# Altium PCB Greenhouse.PcbDoc (part 1 of 2)
Units mil, origin at the board's own origin, x right, y up, seen from the top; angles counter-clockwise.
Board outline 3900 x 3775 mil, 2 copper layers (Top Layer, Bottom Layer); 118 components, 76 nets, 461 pads, 55 vias.
Unrouted connection lines stored in the file: 2.
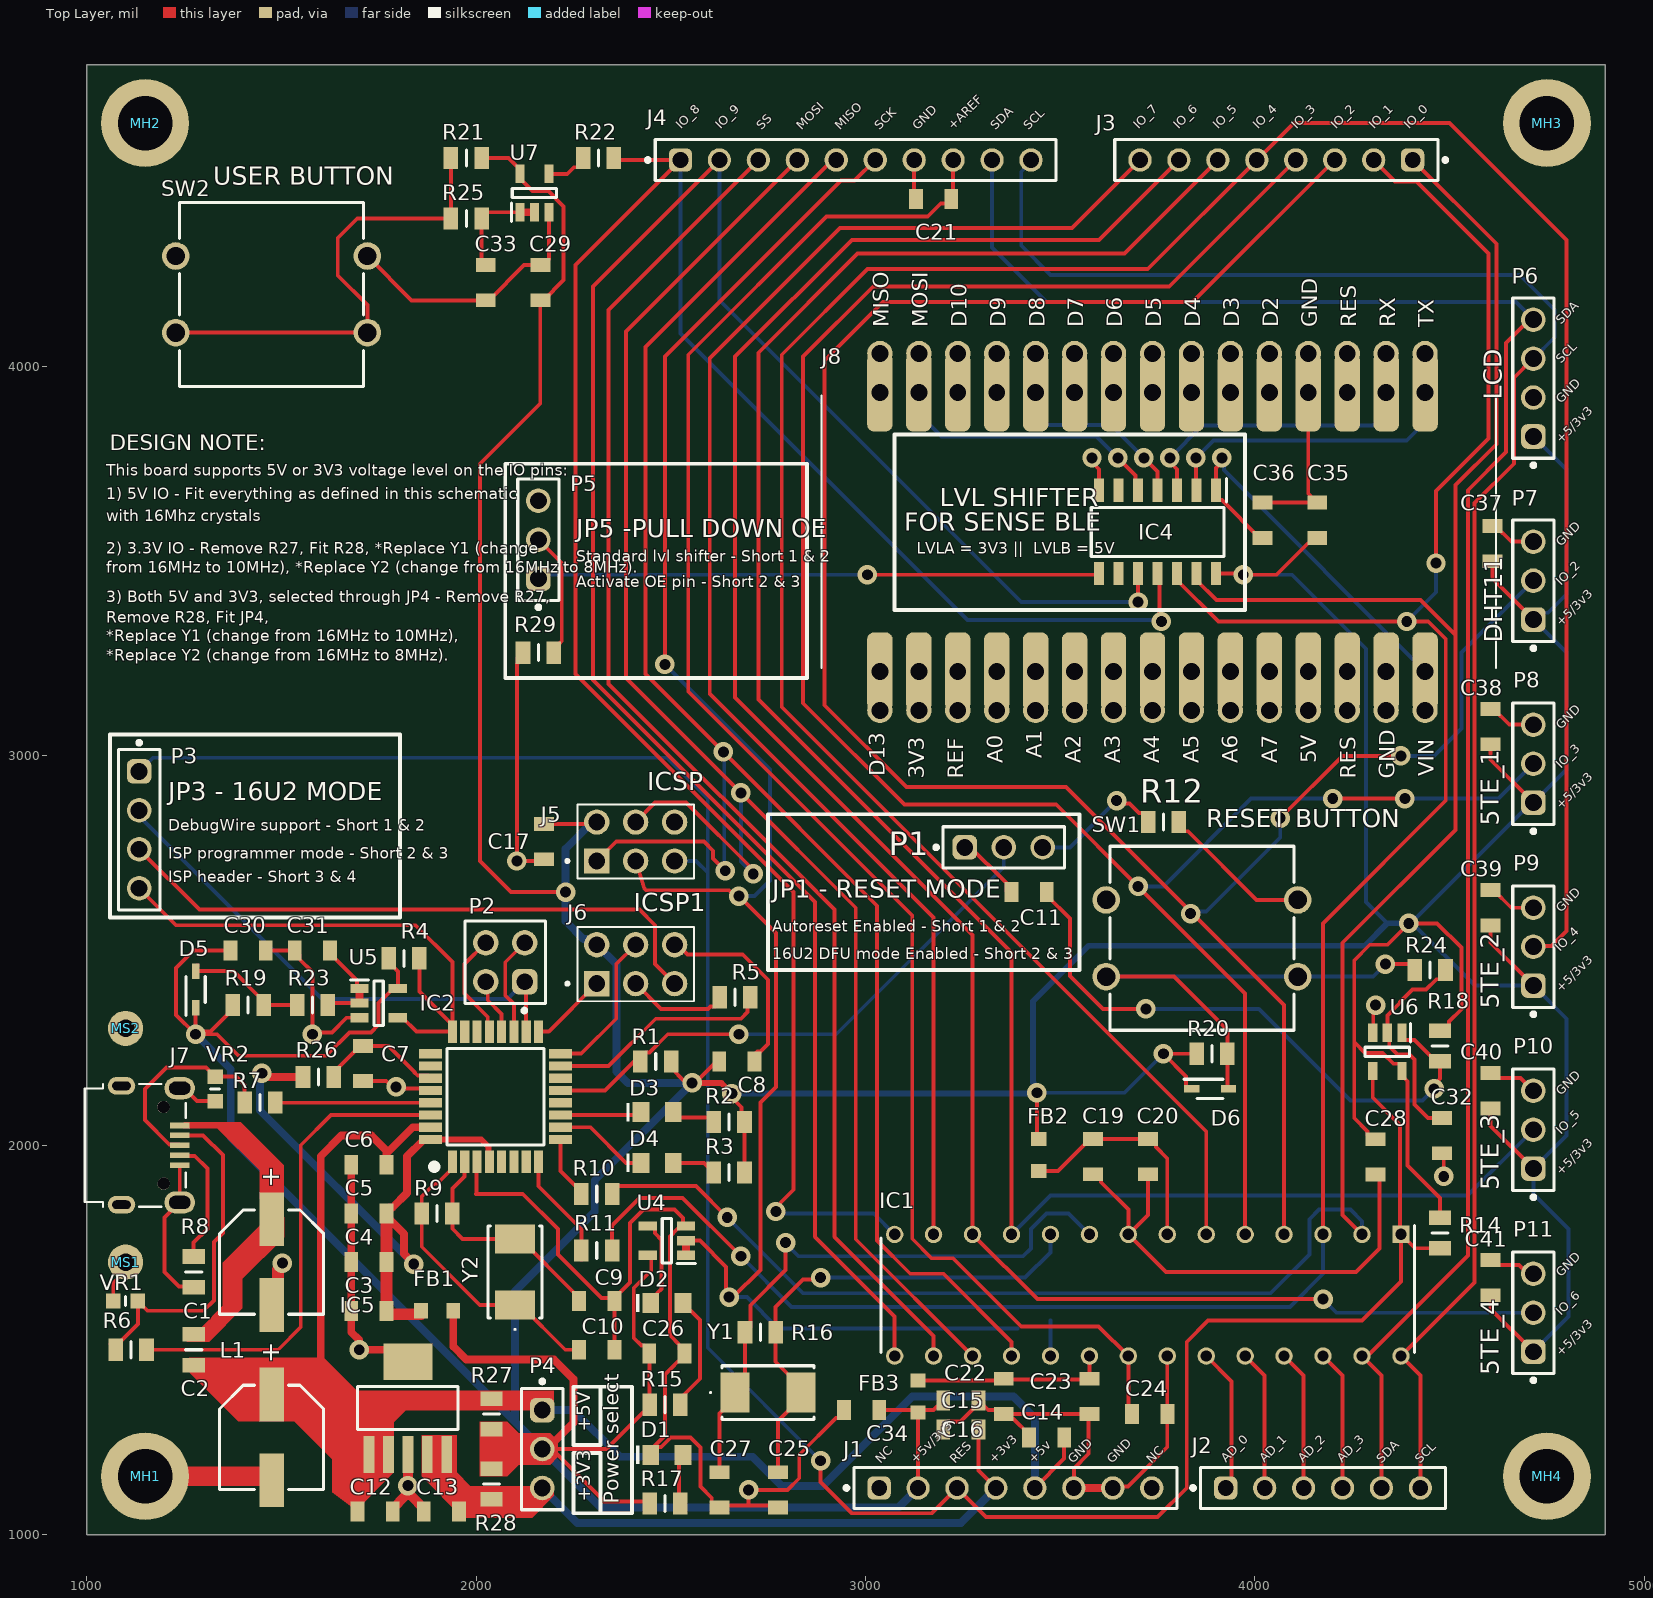
[diagram p0: Top Layer view]
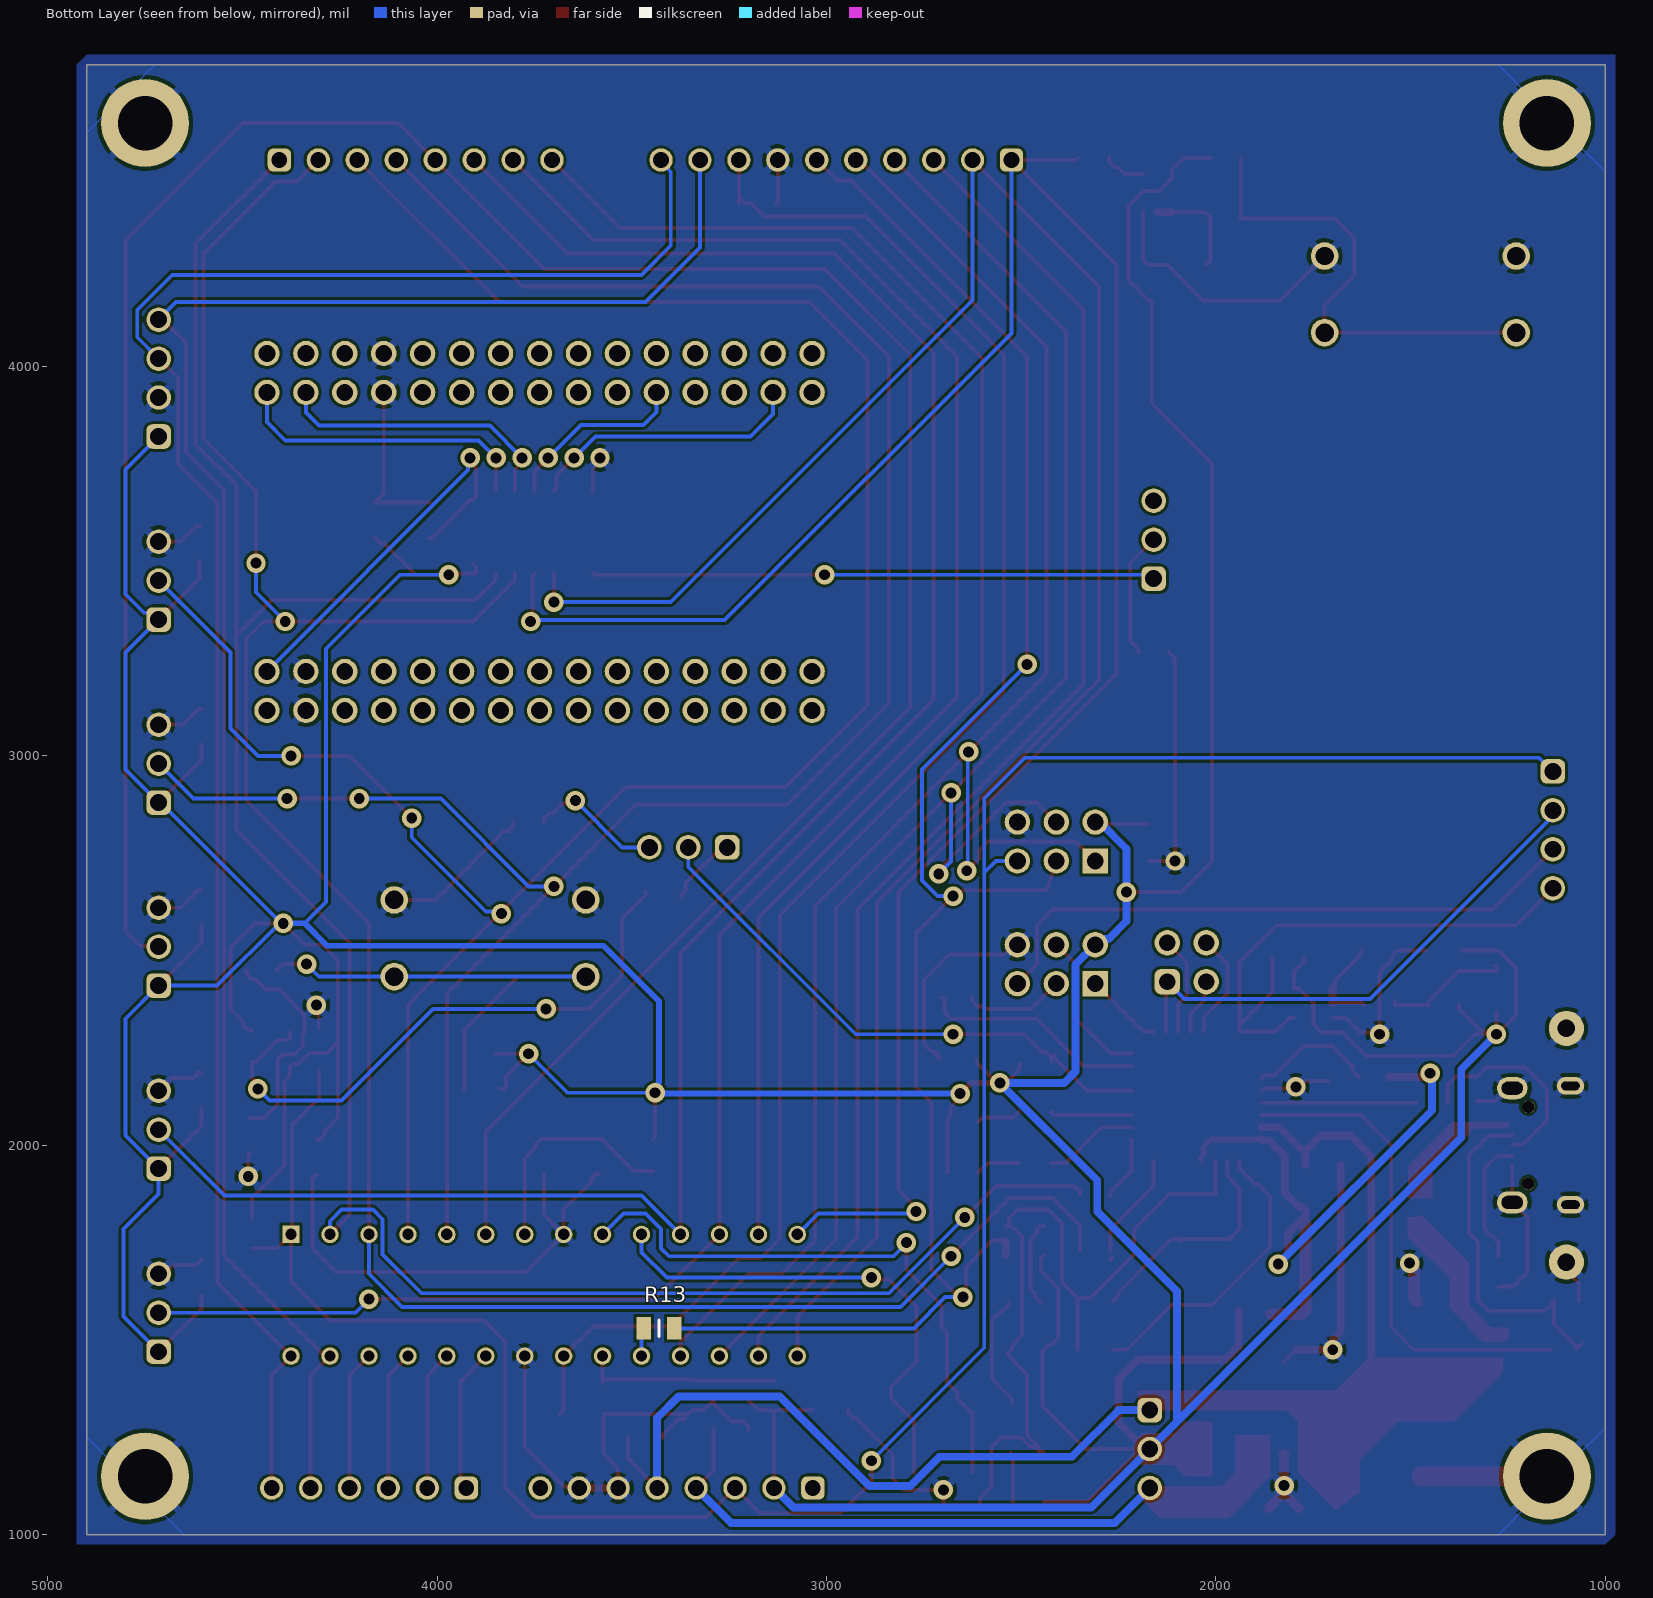
[diagram p1: Bottom Layer view, seen from below]
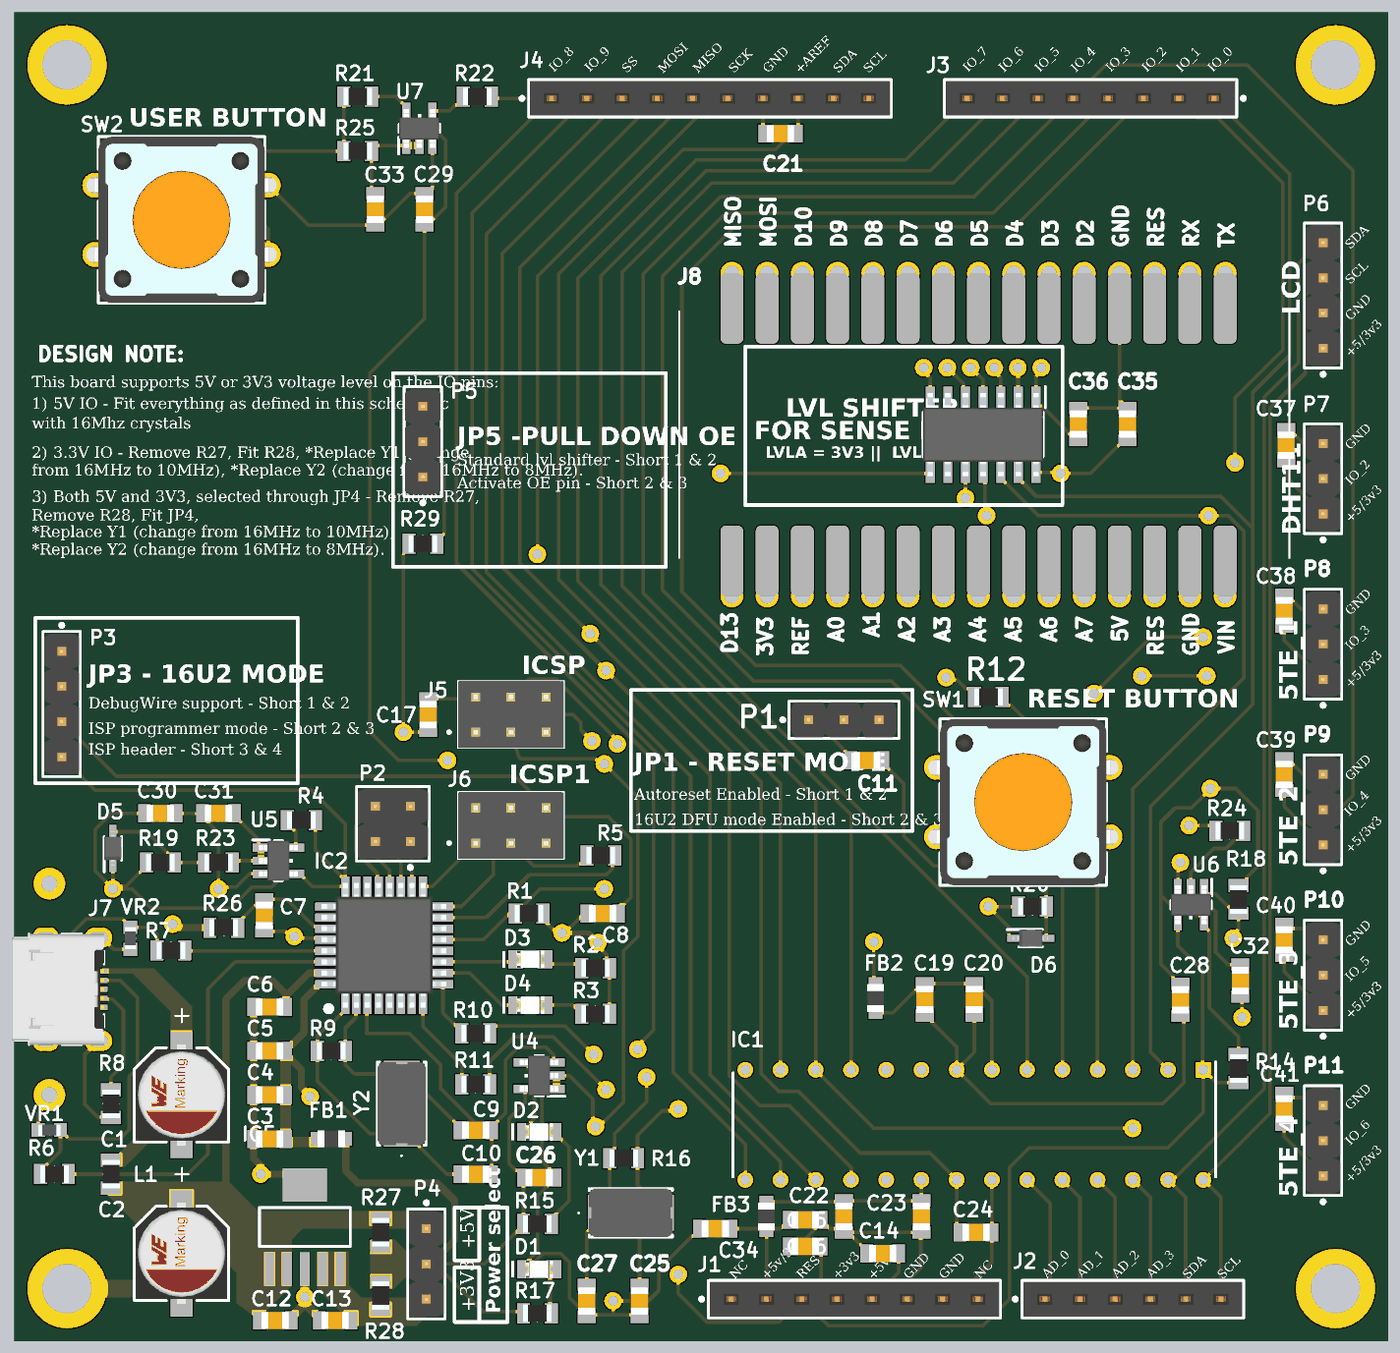
[diagram p3: 3D render of the assembled board from above, using the file's embedded part models]

## Layer stack, top to bottom
Top Solder: solder mask 0.4, Solder Resist, Dk 3.5
Top Layer: signal copper 1.4
Dielectric 1: dielectric 12.6, FR-4, Dk 4.8
Bottom Layer: signal copper 1.4
Bottom Solder: solder mask 0.4, Solder Resist, Dk 3.5

## Board outline
1000,1000 4900,1000 4900,4775 1000,4775

## Design rules (kind name [scope] priority, off if disabled: settings)
Clearance [All] p1: gap=7 ignorepadtopadclearanceinfootprint=FALSE except(5: Text-Text Text-Hole; 10: Arc-Via Track-Via Via-Via)
ComponentClearance [All] p1: gap=10 collisioncheckmode=3 verticalgap=10 showdistances=TRUE donotcheckwithout3dbody=TRUE
HoleSize [All] p1: absolutevalues=TRUE maxlimit=200 minlimit=10 maxpercent=80.000 minpercent=20.000
HoleToHoleClearance [All] p1: gap=11 allowstackedmicrovias=TRUE
PlaneConnect [All] p1: pad.planeconnectstyle=Relief pad.reliefexpansion=20 pad.reliefentries=4 pad.reliefconductorwidth=20 pad.reliefairgap=10 via.planeconnectstyle=Relief via.reliefexpansion=20 via.reliefentries=4 via.reliefconductorwidth=10 via.reliefairgap=10
PolygonConnect [All] p1: connectstyle=Relief reliefconductorwidth=20 reliefentries=4 polygonreliefangle="45 Angle" airgapwidth=10
RoutingVias [All] p1: holewidth=24 width=36 viastyle="Through Hole" minholewidth=14 minwidth=24 maxholewidth=40 maxwidth=50
SilkToSolderMaskClearance [IsPad] p1: minsilkscreentomaskgap=5 clearancetoexposedcopper=TRUE
SolderMaskExpansion [All] p1: expansion=4 istentingtop=FALSE
Width [All] p1: maxlimit=100 minlimit=6 preferedwidth=10 minimp=50.000000 maximp=50.000000 favimp=50.000000
25 further rules are at their usual default settings.

## Components (designator, comment, footprint, x,y, rotation, side; value= is the part's Value field where it differs from the comment)
C1 "100uF" WCAP-ASLI_D6.3H5.5 1475,1700 r90 top
C2 "100uF" WCAP-ASLI_D6.3H5.5 1475,1250 r90 top
C3 "10uF" WCAP_0805_L2W1.25H0.8 1725,1575 r0 top
C4 "100nF" WCAP_0805_L2W1.25H0.8 1725,1700 r0 top
C5 "100nF" WCAP_0805_L2W1.25H0.8 1725,1825 r0 top
C6 "100nf" WCAP_0805_L2W1.25H0.8 1725,1950 r0 top
C7 "1uF" WCAP_0805_L2W1.25H0.8 1710,2210 r90 top
C8 "100nF" WCAP_0805_L2W1.25H0.8 2670,2215 r180 top
C9 "18pF" WCAP_0805_L2W1.25H0.8 2310,1600 r180 top
C10 "18pF" WCAP_0805_L2W1.25H0.8 2310,1475 r180 top
C11 "100nF" WCAP_0805_L2W1.25H0.8 3420,2650 r0 top
C12 "10uF" WCAP_0805_L2W1.25H0.8 1741,1060 r180 top
C13 "10uF" WCAP_0805_L2W1.25H0.8 1911,1060 r0 top
C14 "100nF" WCAP_0805_L2W1.25H0.8 3465,1250 r0 top
C15 "100nF" WCAP_0805_L2W1.25H0.8 3245,1345 r180 top
C16 "100nF" WCAP_0805_L2W1.25H0.8 3245,1270 r0 top
C17 "100nF" WCAP_0805_L2W1.25H0.8 2175,2780 r270 top
C19 "10uF" WCAP_0805_L2W1.25H0.8 3584.51,1971.06 r90 top
C20 "100nF" WCAP_0805_L2W1.25H0.8 3725,1971.06 r90 top
C21 "10uF" WCAP_0805_L2W1.25H0.8 3175,4430 r0 top
C22 "10uF" WCAP_0805_L2W1.25H0.8 3355,1355 r90 top
C23 "100nF" WCAP_0805_L2W1.25H0.8 3575,1355 r90 top
C24 "100nF" WCAP_0805_L2W1.25H0.8 3730,1310 r0 top
C25 "18pF" WCAP_0805_L2W1.25H0.8 2775,1115 r90 top
C26 "100nF" WCAP_0805_L2W1.25H0.8 2490,1465 r180 top
C27 "18pF" WCAP_0805_L2W1.25H0.8 2625,1115 r90 top
C28 "100nF" WCAP_0805_L2W1.25H0.8 4310,1970 r90 top
C29 "100nF" WCAP_0805_L2W1.25H0.8 2165,4215 r270 top
C30 "100nF" WCAP_0805_L2W1.25H0.8 1415,2500 r180 top
C31 "100nF" WCAP_0805_L2W1.25H0.8 1580,2500 r0 top
C32 "100nF" WCAP_0805_L2W1.25H0.8 4480,2025 r90 top
C33 "100nF" WCAP_0805_L2W1.25H0.8 2025,4215 r90 top
C34 "10uF" WCAP_0805_L2W1.25H0.8 2990,1320 r0 top
C35 "100nF" WCAP_0805_L2W1.25H0.8 4160,3605 r270 top
C36 "100nF" WCAP_0805_L2W1.25H0.8 4020,3605 r90 top
C37 "100nF" WCAP_0805_L2W1.25H0.8 4610,3545 r270 top
C38 "100nF" WCAP_0805_L2W1.25H0.8 4605,3075 r270 top
C39 "100nF" WCAP_0805_L2W1.25H0.8 4605,2610 r270 top
C40 "100nF" WCAP_0805_L2W1.25H0.8 4605,2140 r270 top
C41 "100nF" WCAP_0805_L2W1.25H0.8 4605,1660 r270 top
D1 "Green, 3.2V, 140°" WL-SMCW_0805_150080xx75000 2490,1205 r0 top
D2 "Amber, 2V, 140°" WL-SMCW_0805_150080xx75000 2490,1595 r0 top
D3 "Amber, 2V, 140°" WL-SMCW_0805_150080xx75000 2465,2085 r0 top
D4 "Amber, 2V, 140°" WL-SMCW_0805_150080xx75000 2465,1955 r0 top
D5 "BAT54HT1G" SOD2512X110N 1280,2400 r90 top
D6 "BAT54HT1G" SOD2512X110N 3885,2145 r0 top
FB1 "74279204" WE-CBF_0805_L2W1.2H0.9_HS/WB 1900,1575 r180 top
FB2 "74279204" WE-CBF_0805_L2W1.2H0.9_HS/WB 3445,1975 r270 top
FB3 "74279204" WE-CBF_0805_L2W1.2H0.9_HS/WB 3135,1355 r90 top
IC1 "ATMEGA328P-PU" DIP794W53P254L3467H457Q28N 3725,1615 r270 top
IC2 "ATMEGA16U2-AU" QFP80P900X900X120-32N 2050,2125 r90 top
IC4 "TXS0104EDR" SOIC127P600X175-14N 3750,3575 r270 top
IC5 "TL1963A-15DCQR" DCQ0006A_M 1825,1325 r90 top
J1 "1x8 pins" 61300811821 3385,1120 r0 top
J2 "1x6 pin" 61300611821 4175,1120 r0 top
J3 "1x8 pin" 61300811821 4054.92,4530 r180 top
J4 "1x10 pin" 61301011821 2975,4530 r0 top
J5 "2x3 pin" AMPHENOL_67997-106HLF 2410,2780 r0 top
J6 "2x3 pin" AMPHENOL_67997-106HLF 2410,2465 r0 top
J7 "MicroUSB" 629105150521 1125,2000 r270 top
J8 "SocketSense33" Socket_Sense33 3749.79,3570.76 r0 top
L1 "2.2uH - 1.8A" RESC2012X50N 1275,1475 r270 top
MH1 "MountingHole" "Mounting Hole" 1150,1150 r0 top
MH2 "MountingHole" "Mounting Hole" 1150,4625 r0 top
MH3 "MountingHole" "Mounting Hole" 4750,4625 r0 top
MH4 "MountingHole" "Mounting Hole" 4750,1150 r0 top
MS1 "mech_Supp_USB" Mech_Sup_USB 1100,1700 r0 top
MS2 "mech_Supp_USB" Mech_Sup_USB 1100,2300 r0 top
P1 "1x3 pin" 61300311121 3355,2765 r0 top
P2 "2x2 pin" 61300421121 2075,2470 r90 top
P3 "1x4 pin" 61300411121 1135,2810 r270 top
P4 "1x3 pin" 61300311121 2170,1220 r270 top
P5 "1x3 pin" 61300311121 2160,3555 r90 top
P6 "1x4 pin" 61300411121 4715,3970 r90 top
P7 "1x3 pin" 61300311121 4715,3450 r90 top
P8 "1x3 pin" 61300311121 4715,2980 r90 top
P9 "1x3 pin" 61300311121 4715,2510 r90 top
P10 "1x3 pin" 61300311121 4715,2040 r90 top
P11 "1x3 pin" 61300311121 4715,1570 r90 top
R1 "100k" RESC2012X50N 2461.56,2215 r180 top
R2 "560" RESC2012X50N 2650,2060 r180 top
R3 "560" RESC2012X50N 2650,1930 r180 top
R4 "10k" RESC2012X50N 1815,2480 r0 top
R5 "22" RESC2012X50N 2665,2380 r0 top
R6 "22" RESC2012X50N 1114.37,1475 r0 top
R7 "22" RESC2012X50N 1445,2110 r0 top
R8 "0" RESC2012X50N 1275,1675 r90 top
R9 "1M" RESC2012X50N 1900,1825 r0 top
R10 "1k" RESC2012X50N 2310,1875 r0 top
R11 "1k" RESC2012X50N 2310,1730 r0 top
R12 "1k" RESC2012X50N 3765,2830 r180 top
R13 "22" RESC2012X50N 3430,1530 r180 bottom
R14 "10k" RESC2012X50N 4475,1775 r90 top
R15 "560" RESC2012X50N 2485,1333.56 r0 top
R16 "1M" RESC2012X50N 2730,1520 r180 top
R17 "560" RESC2012X50N 2485,1080 r0 top
R18 "10k" RESC2012X50N 4475,2255 r90 top
R19 "10k" RESC2012X50N 1415,2360 r180 top
R20 "10k" RESC2012X50N 3890,2235 r180 top
R21 "10k" RESC2012X50N 1975,4535 r0 top
R22 "560" RESC2012X50N 2314.37,4535 r0 top
R23 "22" RESC2012X50N 1580,2360 r0 top
R24 "22" RESC2012X50N 4450,2450 r0 top
R25 "22" RESC2012X50N 1975,4380 r0 top
R26 "0" RESC2012X50N 1595,2175 r180 top
R27 "0" RESC2012X50N 2040,1310 r90 top
R28 "0" RESC2012X50N 2040,1130 r90 top
R29 "10k" RESC2012X50N 2160,3265 r0 top
SW1 "430456043736" 4304x60437x6 3863.94,2531.57 r0 top
SW2 "430456043736" 4304x60437x6 1475,4185 r0 top
U4 "SN74AHC1G09DBVR" SOT95P280X145-5N 2490,1755 r180 top
U5 "SN74AHC1G09DBVR" SOT95P280X145-5N 1750,2365 r0 top
U6 "SN74AHC1G09DBVR" SOT95P280X145-5N 4340,2240 r270 top
U7 "SN74AHC1G09DBVR" SOT95P280X145-5N 2150,4445 r90 top
VR1 "CG0603MLC-05E" VARC1608X55N 1100,1600 r0 top
VR2 "CG0603MLC-05E" VARC1608X55N 1330,2145 r90 top
Y1 "16MHZ" ABM7 2750,1365 r0 top
Y2 "16MHZ" ABM7 2100,1675 r90 top

## Footprints (in the part's own frame and the unit in brackets; to place one, negate y for a bottom-side part, rotate by r counter-clockwise, add the part's x,y. Pads: shape width x height; smd on the part's side, far side on the other; paste and mask are expansions set on the pad)
4304x60437x6 [mm] "12x12mm washable Tact Switch, THT version"
  round 1.8 hole 1.2: A1(-6.25,2.5) A2(6.25,2.5) B1(-6.25,-2.5) B2(6.25,-2.5)
  silkscreen extent -6,-6 6,6, body extent -6.99,-6 6.99,6, height 4.35
61300311121 [mm] "Pin Header, pitch 2.54 mm, THT, Vertical, single row, 3p"
  rrect50% 1.6x1.6 hole 1.1: 1(-2.54,0)
  round 1.6 hole 1.1: 2(0,0) 3(2.54,0)
  silkscreen extent -4.53,-1.35 3.96,1.35, body extent -3.81,-1.27 3.81,1.27, height 8.57
61300411121 [mm] "Pin Header, pitch 2.54 mm, THT, Vertical, single row, 4p"
  rrect50% 1.6x1.6 hole 1.1: 1(-3.81,0)
  round 1.6 hole 1.1: 2(-1.27,0) 3(1.27,0) 4(3.81,0)
  silkscreen extent -5.8,-1.35 5.23,1.35, body extent -5.08,-1.27 5.08,1.27, height 8.57
61300421121 [mm] "Pin Header, pitch 2.54 mm, THT, Vertical, dual row, 4p"
  rrect50% 1.65x1.65 hole 1.1: 1(-1.27,-1.27)
  round 1.65 hole 1.1: 2(-1.27,1.27) 3(1.27,-1.27) 4(1.27,1.27)
  silkscreen extent -3.27,-2.62 2.69,2.62, body extent -2.54,-2.54 2.54,2.54, height 8.59
61300611821 [mm] "Socket Header, Pitch 2.54 mm, THT, Vertical, single row, 6p"
  rrect50% 1.52x1.52 hole 1.02: 1(-6.35,0)
  round 1.52 hole 1.02: 2(-3.81,0) 3(-1.27,0) 4(1.27,0) 5(3.81,0) 6(6.35,0)
  silkscreen extent -8.6,-1.35 8,1.35, body extent -7.87,-1.25 7.87,1.25, height 8.55
61300811821 [mm] "Socket Header, Pitch 2.54 mm, THT, Vertical, single row, 8p"
  rrect50% 1.52x1.52 hole 1.02: 1(-8.89,0)
  round 1.52 hole 1.02: 2(-6.35,0) 3(-3.81,0) 4(-1.27,0) 5(1.27,0) 6(3.81,0) 7(6.35,0) 8(8.89,0)
  silkscreen extent -11.14,-1.35 10.54,1.35, body extent -10.41,-1.25 10.41,1.25, height 8.55
61301011821 [mm] "Socket Header, Pitch 2.54 mm, THT, Vertical, single row, 10p"
  rrect50% 1.52x1.52 hole 1.02: 1(-11.43,0)
  round 1.52 hole 1.02: 2(-8.89,0) 3(-6.35,0) 4(-3.81,0) 5(-1.27,0) 6(1.27,0) 7(3.81,0) 8(6.35,0) 9(8.89,0) 10(11.43,0)
  silkscreen extent -13.68,-1.35 13.08,1.35, body extent -12.95,-1.25 12.95,1.25, height 8.55
629105150521 [mm] "Micro USB 2.0 SMT Type B Horizontal 5 Contacts High Current"
  rect 0.381x1.295 smd: 1(-1.3,2.9) 2(-0.65,2.9) 3(0,2.9) 4(0.65,2.9) 5(1.3,2.9)
  round 0.8 hole 0.8 unplated: MH1(-2.5,1.85) MH2(2.5,1.85)
  oval 1.15x1.8 hole 0.55 slot 1.2 at 90 deg: Shell(-3.875,-0.9) Shell(3.875,-0.9)
  oval 1.45x2 hole 0.85 slot 1.4 at 90 deg: Shell(-3.725,2.9) Shell(3.725,2.9)
  silkscreen extent -4,-3.3 4,3.3, body extent -4,-3.3 4,3.3, height 2.75
ABM7 [mm]
  rect 1.9x2.6 smd: 1(-2.15,0) 2(2.15,0)
  silkscreen extent -3.8,-1.75 3,1.75, body extent -3,-1.75 3,1.75, height 1.4
AMPHENOL_67997-106HLF [mm]
  rect 1.65x1.65 hole 1.1: 01(-2.54,-1.27)
  round 1.65 hole 1.1: 02(-2.54,1.27) 03(0,-1.27) 04(0,1.27) 05(2.54,-1.27) 06(2.54,1.27)
  silkscreen extent -4.56,-2.41 3.81,2.41, body extent -3.81,-2.41 3.81,2.41, height 8.38
DCQ0006A_M [mm]
  rect 2.4x0.7 smd paste+0 mask+0.051: 1(-3.025,2.54) 2(-3.025,1.27) 3(-3.025,0) 4(-3.025,-1.27) 5(-3.025,-2.54)
  rect 2.4x3.2 smd paste+0 mask+0.051: 6(3.025,0)
  silkscreen extent -1.4,-3.27 1.4,3.27
DIP794W53P254L3467H457Q28N [mil]
  rect 44.61x44.61 / inner round 44.61 / far side rect 44.61x44.61 hole 28.86: 1(-156.26,650)
  round 44.61 hole 28.86: 2(-156.26,550) 3(-156.26,450) 4(-156.26,350) 5(-156.26,250) 6(-156.26,150) 7(-156.26,50) 8(-156.26,-50) 9(-156.26,-150) 10(-156.26,-250) 11(-156.26,-350) 12(-156.26,-450) 13(-156.26,-550) 14(-156.26,-650) 15(156.26,-650) 16(156.26,-550) 17(156.26,-450) 18(156.26,-350) 19(156.26,-250) 20(156.26,-150) 21(156.26,-50) 22(156.26,50) 23(156.26,150) 24(156.26,250) 25(156.26,350) 26(156.26,450) 27(156.26,550) 28(156.26,650)
  silkscreen extent -179,-685 147,685
Mech_Sup_USB [mil]
  round 90 hole 45: 1(0,0)
"Mounting Hole" [mil]
  round 225 hole 140: 1(0,0)
QFP80P900X900X120-32N [mm]
  rect 1.475x0.6 smd: 1(-4.238,2.8) 2(-4.238,2) 3(-4.238,1.2) 4(-4.238,0.4) 5(-4.238,-0.4) 6(-4.238,-1.2) 7(-4.238,-2) 8(-4.238,-2.8) 17(4.238,-2.8) 18(4.238,-2) 19(4.238,-1.2) 20(4.238,-0.4) 21(4.238,0.4) 22(4.238,1.2) 23(4.238,2) 24(4.238,2.8)
  rect 0.6x1.475 smd: 9(-2.8,-4.238) 10(-2,-4.238) 11(-1.2,-4.238) 12(-0.4,-4.238) 13(0.4,-4.238) 14(1.2,-4.238) 15(2,-4.238) 16(2.8,-4.238) 25(2.8,4.238) 26(2,4.238) 27(1.2,4.238) 28(0.4,4.238) 29(-0.4,4.238) 30(-1.2,4.238) 31(-2,4.238) 32(-2.8,4.238)
  silkscreen extent -4.77,-3.15 3.15,4.2, body extent -4.5,-4.5 4.5,4.5, height 1.2
RESC2012X50N [mm]
  rect 0.95x1.45 smd: 1(-1,0) 2(1,0)
  silkscreen extent 0,-0.53 0,0.53, body extent -1.02,-0.63 1.02,0.63, height 0.5
Socket_Sense33 [mm] "custom socket for Sense33"
  round 1.65 hole 1.1: 1(17.455,-11.532) 1(17.455,-8.992) 2(17.455,9.208) 2(17.455,11.748) 3(14.915,9.208) 3(14.915,11.748) 4(-7.945,9.208) 4(-7.945,11.748) 5(-15.565,9.208) 5(-15.565,11.748) 6(9.835,9.208) 6(9.835,11.748) 6(14.915,-11.532) 6(14.915,-8.992) ""(-18.105,-11.532) ""(-18.105,-8.992) ""(-18.105,9.208) ""(-18.105,11.748) ""(-15.565,-11.532) ""(-15.565,-8.992) ""(-13.025,-11.532) ""(-13.025,-8.992) ""(-13.025,9.208) ""(-13.025,11.748) ""(-10.485,-11.532) ""(-10.485,-8.992) ""(-10.485,9.208) ""(-10.485,11.748) ""(-7.945,-11.532) ""(-7.945,-8.992) ""(-5.405,-11.532) ""(-5.405,-8.992) ""(-5.405,9.208) ""(-5.405,11.748) ""(-2.865,-11.532) ""(-2.865,-8.992) ""(-2.865,9.208) ""(-2.865,11.748) ""(-0.325,-11.532) ""(-0.325,-8.992) ""(-0.325,9.208) ""(-0.325,11.748) ""(2.215,-11.532) ""(2.215,-8.992) ""(2.215,9.208) ""(2.215,11.748) ""(4.755,-11.532) ""(4.755,-8.992) ""(4.755,9.208) ""(4.755,11.748) ""(7.295,-11.532) ""(7.295,-8.992) ""(7.295,9.208) ""(7.295,11.748) ""(9.835,-11.532) ""(9.835,-8.992) ""(12.375,-11.532) ""(12.375,-8.992) ""(12.375,9.208) ""(12.375,11.748)
  rrect50% 1.651x5.08 smd: 1(17.455,-8.992) 2(17.455,9.208) 3(14.915,9.208) 4(-7.945,9.208) 5(-15.565,9.208) 6(9.835,9.208) 6(14.915,-8.992) ""(-18.105,-8.992) ""(-18.105,9.208) ""(-15.565,-8.992) ""(-13.025,-8.992) ""(-13.025,9.208) ""(-10.485,-8.992) ""(-10.485,9.208) ""(-7.945,-8.992) ""(-5.405,-8.992) ""(-5.405,9.208) ""(-2.865,-8.992) ""(-2.865,9.208) ""(-0.325,-8.992) ""(-0.325,9.208) ""(2.215,-8.992) ""(2.215,9.208) ""(4.755,-8.992) ""(4.755,9.208) ""(7.295,-8.992) ""(7.295,9.208) ""(9.835,-8.992) ""(12.375,-8.992) ""(12.375,9.208)
  silkscreen extent -21.91,-8.78 22.09,9
SOD2512X110N [mm]
  rect 1x0.5 smd: 1(-1.2,0) 2(1.2,0)
  silkscreen extent -1.7,-0.63 0.85,0.63, body extent -1.25,-0.63 1.25,0.63, height 1.1
SOIC127P600X175-14N [mm]
  rect 1.525x0.65 smd: 1(-2.712,3.81) 2(-2.712,2.54) 3(-2.712,1.27) 4(-2.712,0) 5(-2.712,-1.27) 6(-2.712,-2.54) 7(-2.712,-3.81) 8(2.712,-3.81) 9(2.712,-2.54) 10(2.712,-1.27) 11(2.712,0) 12(2.712,1.27) 13(2.712,2.54) 14(2.712,3.81)
  silkscreen extent -3.47,-4.33 1.6,4.48, body extent -3,-4.33 3,4.33, height 1.75
SOT95P280X145-5N [mm]
  rect 1.2x0.6 smd: 1(-1.25,0.95) 2(-1.25,0) 3(-1.25,-0.95) 4(1.25,-0.95) 5(1.25,0.95)
  silkscreen extent -1.85,-1.45 0.3,1.5, body extent -1.4,-1.45 1.4,1.45, height 1.2
VARC1608X55N [mm]
  rect 0.95x1 smd: 1(-0.8,0) 2(0.8,0)
  silkscreen extent 0,-0.3 0,0.3, body extent -0.8,-0.4 0.8,0.4, height 0.55
WCAP-ASLI_D6.3H5.5 [mm] "Aluminium Electrolytic V-Chip SMT Capacitors, 6.3x5.5mm"
  rect 3.5x1.6 smd: 1(2.8,0) 2(-2.8,0)
  silkscreen extent -3.4,-3.4 3.4,3.4, body extent -3.65,-3.3 3.65,3.3, height 5.5
WCAP_0805_L2W1.25H0.8 [mm] "Ceramic Capacitors, body 2x1.25mm"
  rect 0.9x1.3 smd: 1(-1.15,0) 2(1.15,0)
  body extent -1,-0.63 1,0.63, height 0.8
WE-CBF_0805_L2W1.2H0.9_HS/WB [mm] "SMD EMI Suppression Ferrite  Bead, body 2.00x1.20mm"
  rect 0.9x1 smd: 1(-1.05,0) 2(1.05,0)
  body extent -1,-0.6 1,0.6, height 0.9
WL-SMCW_0805_150080xx75000 [mm] "SMD Mono-color Chip LED, body 2.0x1.25mm"
  rect 1.1x1.3 smd: 1(-1.05,0) 2(1.05,0)
  silkscreen extent -2,-0.6 -1.8,0.6, body extent -1,-0.63 1,0.62, height 0.7

## Part data
C1 C2: library part 865080243007, "WCAP-ASLI Aluminum Electrolytic Capacitor, V-Chip, D6.3 x H5.5mm, 100uF, 10V", Capacitance Tolerance=+/-20%, Leakage Current=10uA, Manufacturer="Wurth Elektronik", Operating Temperature Max=105°C, Operating Temperature Min=-55°C, Rated Voltage (DC)=10V, Ripple Current=240mA, Capacitance=100uF, Category="Aluminum Electrolytic Capacitors", ComponentLink1Description="Website Link", ComponentLink1URL=https://www.we-online.com/redexpert/article/865080243007?ad, ComponentLink2Description="Datasheet Link", ComponentLink2URL=https://www.we-online.com/redexpert/spec/865080243007?ad, Diameter=6.3mm, Dissipation Factor=19%, Endurance=2000h, Height=5.5mm, Manufacturer Part Number=865080243007, Match Code=WCAP-ASLI, Mount="Surface Mount", Packaging="Tape and Reel", Technical Reference=ASED055101M010DVCTBB000
C3 C4 C5 C6 C7 C8 C9 C10 C11 C12 C13 C14 C15 C16 C17 C19 C20 C21 C22 C23 C24 C25 C26 C27 C28 C29 C30 C31 C32 C33 C34 C35 C36 C37 C38 C39 C40 C41: library part CeramicCap, Capacitance=100pF, Capacitance Tolerance=+/-5%, Case/Size Code=0201, Insulation Resistance=10GOhm, Manufacturer="Wurth Elektronik", Manufacturer Part Number=885012004001, Operating Temperature Max=125°C, Operating Temperature Min=-55°C, Rated Voltage (DC)=25V, Category="Multilayer Ceramic Chip Capacitors", Ceramic Type="NP0 Class I", ComponentLink1Description="Website Link", ComponentLink1URL=https://www.we-online.com/redexpert/article/885012004001?ad, ComponentLink2Description="Datasheet Link", ComponentLink2URL=https://www.we-online.com/redexpert/spec/885012004001?ad, Height=0.3mm, Length=0.6mm, Match Code=WCAP-CSGP, Mount="Surface Mount", Packaging="Tape and Reel", Q Factor=1000, Technical Reference=NP00201101J025DFCT10000, Width=0.3mm
D1: library part 150080GS75000, "WL-SMCW Mono-color Chip LED Waterclear, size 0805, Green, 3.2V, 140°", Case/Size Code=0805, Emitting Color=Green, Forward Voltage=3.2V, Manufacturer="Wurth Elektronik", Operating Temperature Max=85°C, Operating Temperature Min=-40°C, Category="Signal LEDs", Chip Technology=InGaN, ComponentLink1Description="Website Link", ComponentLink1URL=https://www.we-online.com/redexpert/article/150080GS75000?ad, ComponentLink2Description="Datasheet Link", ComponentLink2URL=https://www.we-online.com/redexpert/spec/150080GS75000?ad, Dominant Wavelength=525nm, Height=0.7mm, Length=2mm, Luminous Intensity=450mcd, Manufacturer Part Number=150080GS75000, Match Code=WL-SMCW, Mount="Surface Mount", Packaging="Tape and Reel", Peak Wavelength=515nm, Viewing Angle=140°, Width=1.25mm
D2 D3 D4: library part 150080AS75000, "WL-SMCW Mono-color Chip LED Waterclear, size 0805, Amber, 2V, 140°", Case/Size Code=0805, Emitting Color=Amber, Forward Voltage=2V, Manufacturer="Wurth Elektronik", Operating Temperature Max=85°C, Operating Temperature Min=-40°C, Category="Signal LEDs", Chip Technology=AlInGaP, ComponentLink1Description="Website Link", ComponentLink1URL=https://www.we-online.com/redexpert/article/150080AS75000?ad, ComponentLink2Description="Datasheet Link", ComponentLink2URL=https://www.we-online.com/redexpert/spec/150080AS75000?ad, Dominant Wavelength=605nm, Height=0.7mm, Length=2mm, Luminous Intensity=130mcd, Manufacturer Part Number=150080AS75000, Match Code=WL-SMCW, Mount="Surface Mount", Packaging="Tape and Reel", Peak Wavelength=610nm, Viewing Angle=140°, Width=1.25mm
D5 D6: "Diode Shotkey", Manufacturer_Name=onsemi, Mouser Part Number=863-BAT54HT1G, Arrow Part Number=BAT54HT1G, Arrow Price/Stock=https://www.arrow.com/en/products/bat54ht1g/on-semiconductor?region=nac, Datasheet Link=https://componentsearchengine.com/Datasheets/2/BAT54HT1G.pdf, Height=1.1mm, Manufacturer_Part_Number=BAT54HT1G, Mouser Price/Stock=https://www.mouser.co.uk/ProductDetail/onsemi/BAT54HT1G?qs=vLkC5FC1VN%252BK3ZQA%252ByHPIA%3D%3D
FB1 FB2 FB3: "WE-CBF SMT EMI Suppression Ferrite Bead, size 0805, 600Ohm, 1.5A", Case/Size Code=0805, DC Resistance Max=0.35Ohm, Manufacturer="Wurth Elektronik", Operating Temperature Max=125°C, Operating Temperature Min=-55°C, Rated Current=1.5A, Category="Ferrites for PCB Assembly", ComponentLink1Description="Website Link", ComponentLink1URL=https://www.we-online.com/redexpert/article/74279204?ad, ComponentLink2Description="Datasheet Link", ComponentLink2URL=https://www.we-online.com/redexpert/spec/74279204?ad, Height=0.9mm, Impedance @100MHz=600Ohm, Impedance Max=700Ohm, Impedance Max Test Condition=150MHz, Length=2mm, Manufacturer Part Number=74279204, Match Code=WE-CBF, Mount="Surface Mount", Packaging="Tape and Reel", Type="Wide Band", Width=1.2mm
IC1: "MICROCHIP - ATMEGA328P-PU. - MICROCONTROLLER MCU, 8 BIT, ATMEGA, 20MHZ, DIP-28", Manufacturer_Name=Microchip, Mouser Part Number=556-ATMEGA328P-PU, Datasheet Link=https://www.mouser.ca/datasheet/2/268/ATmega48A_PA_88A_PA_168A_PA_328_P_DS_DS40002061B-3050139.pdf, Geometry.Height=4.572mm, Manufacturer_Part_Number=ATMEGA328P-PU, Mouser Price/Stock=https://www.mouser.co.uk/ProductDetail/Microchip-Technology/ATMEGA328P-PU?qs=K8BHR703ZXguOQv3sKbWcg%3D%3D
IC2: "Integrated Circuit", Manufacturer_Name=Microchip, Mouser Part Number=556-ATMEGA16U2-AU, Arrow Part Number=ATMEGA16U2-AU, Arrow Price/Stock=https://www.arrow.com/en/products/atmega16u2-au/microchip-technology?region=europe, Datasheet Link=http://www.atmel.com/images/doc7799.pdf, Height=1.2mm, Manufacturer_Part_Number=ATMEGA16U2-AU, Mouser Price/Stock=https://www.mouser.co.uk/ProductDetail/Microchip-Technology/ATMEGA16U2-AU?qs=JV7lzlMm3yJerHSPc%2FAMcA%3D%3D
IC4: "Integrated Circuit", Manufacturer_Name="Texas Instruments", Mouser Part Number=595-TXS0104EDR, Arrow Part Number=TXS0104EDR, Arrow Price/Stock=https://www.arrow.com/en/products/txs0104edr/texas-instruments?region=nac, Datasheet Link=http://www.ti.com/lit/gpn/txs0104e, Height=1.75mm, Manufacturer_Part_Number=TXS0104EDR, Mouser Price/Stock=https://www.mouser.co.uk/ProductDetail/Texas-Instruments/TXS0104EDR?qs=7kv20MEVUljeQYQBZTsYxg%3D%3D
IC5: "3v3 LDO", Alternate_PartNumber=TL1963ADCQT, Manufacturer="Texas Instruments", PartNumber=TL1963ADCQR, CompType=IC, Mfr_Name="Texas Instruments", MountType=SMT, PackageReference=DCQ0006A, RefDes=RefDes, RoHS=Y, Type=TYPE
J1 J3: library part 61300811821, "61300811821 WR-PHD Socket Header, THT, Vertical, pitch 2.54mm, 1 Row, 8P", Contact Resistance=20mOhm, Manufacturer="Wurth Elektronik", Operating Temperature Max=125°C, Operating Temperature Min=-40°C, Rated Current=3A, Withstanding Voltage=500V, Working Voltage=250V, Category="Board-to-Board Connectors", ComponentLink1Description="Website Link", ComponentLink1URL=https://www.we-online.com/redexpert/article/61300811821?ad, ComponentLink2Description="Datasheet Link", ComponentLink2URL=https://www.we-online.com/redexpert/spec/61300811821?ad, Gender="Socket Header", Manufacturer Part Number=61300811821, Match Code=WR-PHD, Mount="Through Hole", Number of Pins=8, Number of Rows=1, Orientation=Vertical, Packaging=Tray, Pitch=2.54mm
J2: library part 61300611821, "61300611821 WR-PHD Socket Header, THT, Vertical, pitch 2.54mm, 1 Row, 6P", Contact Resistance=20mOhm, Manufacturer="Wurth Elektronik", Operating Temperature Max=125°C, Operating Temperature Min=-40°C, Rated Current=3A, Withstanding Voltage=500V, Working Voltage=250V, Category="Board-to-Board Connectors", ComponentLink1Description="Website Link", ComponentLink1URL=https://www.we-online.com/redexpert/article/61300611821?ad, ComponentLink2Description="Datasheet Link", ComponentLink2URL=https://www.we-online.com/redexpert/spec/61300611821?ad, Gender="Socket Header", Manufacturer Part Number=61300611821, Match Code=WR-PHD, Mount="Through Hole", Number of Pins=6, Number of Rows=1, Orientation=Vertical, Packaging=Tray, Pitch=2.54mm
J4: library part 61301011821, "61301011821 WR-PHD Socket Header, THT, Vertical, pitch 2.54mm, 1 Row, 10P", Contact Resistance=20mOhm, Manufacturer="Wurth Elektronik", Operating Temperature Max=105°C, Operating Temperature Min=-40°C, Rated Current=3A, Withstanding Voltage=500V, Working Voltage=250V, Category="Board-to-Board Connectors", ComponentLink1Description="Website Link", ComponentLink1URL=https://www.we-online.com/redexpert/article/61301011821?ad, ComponentLink2Description="Datasheet Link", ComponentLink2URL=https://www.we-online.com/redexpert/spec/61301011821?ad, Gender="Socket Header", Manufacturer Part Number=61301011821, Match Code=WR-PHD, Mount="Through Hole", Number of Pins=10, Number of Rows=1, Orientation=Vertical, Packaging=Tray, Pitch=2.54mm
J5 J6: library part 67997-106HLF, "67997-106HLF BergStikÂ®, Board to Board connector, Unshrouded vertical header, Through Hole, Double Row, 6 Positions, 2.54 mm (0.100in) Pitch", Package=None, Availability="In Stock", Check_prices=https://www.snapeda.com/parts/67997-106HLF/Amphenol+FCI/view-part/?ref=eda, MF="Amphenol ICC", MP=67997-106HLF, Price=None, Purchase-URL=https://pricing.snapeda.com/search/part/67997-106HLF/?ref=eda, SnapEDA_Link=https://www.snapeda.com/parts/67997-106HLF/Amphenol+FCI/view-part/?ref=snap
J7: library part 629105150521, "629105150521 WR-COM Micro USB 2.0 SMT Type B Horizontal 5 Contacts High Current", Manufacturer="Wurth Elektronik", Operating Temperature Max=85°C, Operating Temperature Min=-40°C, Rated Current=3A, Working Voltage="30V (AC)", Application="Micro USB 2.0", Category="Input/Output Connectors", ComponentLink1Description="Website Link", ComponentLink1URL=https://www.we-online.com/redexpert/article/629105150521?ad, ComponentLink2Description="Datasheet Link", ComponentLink2URL=https://www.we-online.com/redexpert/spec/629105150521?ad, Gender=Receptacle, Interface Type="Type B", Manufacturer Part Number=629105150521, Match Code=WR-USB, Mount="Surface Mount", Number of Pins=5, Number of Ports=1, Orientation=Horizontal, Packaging="Tape and Reel"
L1: library part "Power Inductor", "Power Inductors - SMD 0805 2.2uH 20%", Arrow Part Number=CI160808-R10J, Manufacturer_Name=Bourns, Mouser Part Number=652-CI160808-R10J, Arrow Price/Stock=https://www.arrow.com/en/products/ci160808-r10j/bourns, Manufacturer_Part_Number=CI160808-R10J, Mouser Price/Stock=https://www.mouser.co.uk/ProductDetail/Bourns/CI160808-R10J?qs=uD%2FoUDWqfvSQYk45NmNjYw%3D%3D
P1 P4 P5 P7 P8 P9 P10 P11: library part 61300311121, "61300311121 WR-PHD Pin Header, THT, Vertical, pitch 2.54mm, 1 Row, 3P", Contact Resistance=20mOhm, Manufacturer="Wurth Elektronik", Operating Temperature Max=105°C, Operating Temperature Min=-40°C, Rated Current=3A, Withstanding Voltage=500V, Working Voltage=250V, Category="Board-to-Board Connectors", ComponentLink1Description="Website Link", ComponentLink1URL=https://www.we-online.com/redexpert/article/61300311121?ad, ComponentLink2Description="Datasheet Link", ComponentLink2URL=https://www.we-online.com/redexpert/spec/61300311121?ad, Gender="Pin Header", Manufacturer Part Number=61300311121, Match Code=WR-PHD, Mount="Through Hole", Number of Pins=3, Number of Rows=1, Orientation=Vertical, Packaging=Bag, Pitch=2.54mm
P2: library part 61300421121, "61300421121 WR-PHD Pin Header, THT, Vertical, pitch 2.54mm, 2 Row, 4P", Contact Resistance=20mOhm, Manufacturer="Wurth Elektronik", Operating Temperature Max=105°C, Operating Temperature Min=-40°C, Rated Current=3A, Withstanding Voltage=500V, Working Voltage=250V, Category="Board-to-Board Connectors", ComponentLink1Description="Website Link", ComponentLink1URL=https://www.we-online.com/redexpert/article/61300421121?ad, ComponentLink2Description="Datasheet Link", ComponentLink2URL=https://www.we-online.com/redexpert/spec/61300421121?ad, Gender="Pin Header", Manufacturer Part Number=61300421121, Match Code=WR-PHD, Mount="Through Hole", Number of Pins=4, Number of Rows=2, Orientation=Vertical, Packaging=Bag, Pitch=2.54mm
P3 P6: library part 61300411121, "61300411121 WR-PHD Pin Header, THT, Vertical, pitch 2.54mm, 1 Row, 4P", Contact Resistance=20mOhm, Manufacturer="Wurth Elektronik", Operating Temperature Max=105°C, Operating Temperature Min=-40°C, Rated Current=3A, Withstanding Voltage=500V, Working Voltage=250V, Category="Board-to-Board Connectors", ComponentLink1Description="Website Link", ComponentLink1URL=https://www.we-online.com/redexpert/article/61300411121?ad, ComponentLink2Description="Datasheet Link", ComponentLink2URL=https://www.we-online.com/redexpert/spec/61300411121?ad, Gender="Pin Header", Manufacturer Part Number=61300411121, Match Code=WR-PHD, Mount="Through Hole", Number of Pins=4, Number of Rows=1, Orientation=Vertical, Packaging=Bag, Pitch=2.54mm
R1: library part Resistor0805, "Resistor 100k", Arrow Part Number=AC05000004707JAC00, Manufacturer_Name=Vishay, Mouser Part Number=594-AC05W0R470J, Arrow Price/Stock=https://www.arrow.com/en/products/ac05000004707jac00/vishay, Datasheet Link=https://www.vishay.com/docs/28730/acac-at.pdf, Manufacturer_Part_Number=AC05000004707JAC00, Mouser Price/Stock=https://www.mouser.co.uk/ProductDetail/Vishay-Draloric/AC05000004707JAC00?qs=9EcTHFQkrt89eb2J9Rg7Vw%3D%3D
R2 R3 R15 R17 R22: library part Resistor0805, "Resistor 560 Ohm", Arrow Part Number=AC05000004707JAC00, Manufacturer_Name=Vishay, Mouser Part Number=594-AC05W0R470J, Arrow Price/Stock=https://www.arrow.com/en/products/ac05000004707jac00/vishay, Datasheet Link=https://www.vishay.com/docs/28730/acac-at.pdf, Manufacturer_Part_Number=AC05000004707JAC00, Mouser Price/Stock=https://www.mouser.co.uk/ProductDetail/Vishay-Draloric/AC05000004707JAC00?qs=9EcTHFQkrt89eb2J9Rg7Vw%3D%3D
R4 R10 R11 R12 R14 R18 R19 R20 R21 R29: library part Resistor0805, "Resistor 10k", Arrow Part Number=AC05000004707JAC00, Manufacturer_Name=Vishay, Mouser Part Number=594-AC05W0R470J, Arrow Price/Stock=https://www.arrow.com/en/products/ac05000004707jac00/vishay, Datasheet Link=https://www.vishay.com/docs/28730/acac-at.pdf, Manufacturer_Part_Number=AC05000004707JAC00, Mouser Price/Stock=https://www.mouser.co.uk/ProductDetail/Vishay-Draloric/AC05000004707JAC00?qs=9EcTHFQkrt89eb2J9Rg7Vw%3D%3D
R5: library part Resistor0805, "Resistor 22", Arrow Part Number=AC05000004707JAC00, Manufacturer_Name=Vishay, Mouser Part Number=594-AC05W0R470J, Arrow Price/Stock=https://www.arrow.com/en/products/ac05000004707jac00/vishay, Datasheet Link=https://www.vishay.com/docs/28730/acac-at.pdf, Manufacturer_Part_Number=AC05000004707JAC00, Mouser Price/Stock=https://www.mouser.co.uk/ProductDetail/Vishay-Draloric/AC05000004707JAC00?qs=9EcTHFQkrt89eb2J9Rg7Vw%3D%3D
R6 R7 R13 R23 R24 R25: library part Resistor0805, "Resistor 22Ohm", Arrow Part Number=AC05000004707JAC00, Manufacturer_Name=Vishay, Mouser Part Number=594-AC05W0R470J, Arrow Price/Stock=https://www.arrow.com/en/products/ac05000004707jac00/vishay, Datasheet Link=https://www.vishay.com/docs/28730/acac-at.pdf, Manufacturer_Part_Number=AC05000004707JAC00, Mouser Price/Stock=https://www.mouser.co.uk/ProductDetail/Vishay-Draloric/AC05000004707JAC00?qs=9EcTHFQkrt89eb2J9Rg7Vw%3D%3D
R8 R26 R27 R28: library part Resistor0805, "Resistor 0 Ohm", Arrow Part Number=AC05000004707JAC00, Manufacturer_Name=Vishay, Mouser Part Number=594-AC05W0R470J, Arrow Price/Stock=https://www.arrow.com/en/products/ac05000004707jac00/vishay, Datasheet Link=https://www.vishay.com/docs/28730/acac-at.pdf, Manufacturer_Part_Number=AC05000004707JAC00, Mouser Price/Stock=https://www.mouser.co.uk/ProductDetail/Vishay-Draloric/AC05000004707JAC00?qs=9EcTHFQkrt89eb2J9Rg7Vw%3D%3D
R9 R16: library part Resistor0805, "Resistor 1M", Arrow Part Number=AC05000004707JAC00, Manufacturer_Name=Vishay, Mouser Part Number=594-AC05W0R470J, Arrow Price/Stock=https://www.arrow.com/en/products/ac05000004707jac00/vishay, Datasheet Link=https://www.vishay.com/docs/28730/acac-at.pdf, Manufacturer_Part_Number=AC05000004707JAC00, Mouser Price/Stock=https://www.mouser.co.uk/ProductDetail/Vishay-Draloric/AC05000004707JAC00?qs=9EcTHFQkrt89eb2J9Rg7Vw%3D%3D
SW1 SW2: "430456043736 WS-TATV THT Washable Tact Switch 12x12mm, SPST-NO, 12VDC, 50mA, 360g", Manufacturer="Wurth Elektronik", Operating Temperature Max=85°C, Operating Temperature Min=-40°C, Rated Current=50mA, Rated Voltage=12VDC, Category="Tact Switches", Circuit=SPST-NO, ComponentLink1Description="Website Link", ComponentLink1URL=https://www.we-online.com/redexpert/article/430456043736?ad, ComponentLink2Description="Datasheet Link", ComponentLink2URL=https://www.we-online.com/redexpert/spec/430456043736?ad, Contact Material="Stainless Steel", Contact Plating=Silver, Height=4.3mm, Length=12mm, Manufacturer Part Number=430456043736, Match Code=WS-TATV, Mount="Through Hole", Operation Force=360g, Packaging=Bulk, Terminal Material="Copper Alloy", Terminal Plating=Silver, Washable=Yes, Width=12mm
U4 U5 U6 U7: "Logic Gate Sgl 2Inp Pos-AND Gate", Manufacturer_Name="Texas Instruments", Mouser Part Number=595-SN74AHC1G09DBVR, Arrow Part Number=SN74AHC1G09DBVR, Arrow Price/Stock=https://www.arrow.com/en/products/sn74ahc1g09dbvr/texas-instruments?region=nac, Datasheet Link=http://www.ti.com/lit/gpn/sn74ahc1g09, Height=1.45mm, Manufacturer_Part_Number=SN74AHC1G09DBVR, Mouser Price/Stock=https://www.mouser.co.uk/ProductDetail/Texas-Instruments/SN74AHC1G09DBVR?qs=SMj%252Bbyv09TwoyWK2f6L9Mg%3D%3D
VR1 VR2: "Varistor CG0603MLC-05E", Manufacturer_Name=Bourns, Mouser Part Number=652-CG0603MLC-05E, Arrow Part Number=CG0603MLC-05E, Arrow Price/Stock=https://www.arrow.com/en/products/cg0603mlc-05e/bourns?region=nac, Datasheet Link=http://www.farnell.com/datasheets/1785244.pdf, Height=0.55mm, Manufacturer_Part_Number=CG0603MLC-05E, Mouser Price/Stock=https://www.mouser.co.uk/ProductDetail/Bourns/CG0603MLC-05E?qs=lDok7oSghXVLNKMK69q%252BFQ%3D%3D
Y1 Y2: library part ABM7-16.000MHZ-D2Y-T, "Crystal or Oscillator", Manufacturer_Name=ABRACON, Mouser Part Number=815-ABM7-16-D2Y-T, Arrow Part Number=ABM7-16.000MHZ-D2Y-T, Arrow Price/Stock=https://www.arrow.com/en/products/abm7-16.000mhz-d2y-t/abracon?region=nac, Datasheet Link=https://abracon.com/Resonators/abm7.pdf, Height=1.4mm, Manufacturer_Part_Number=ABM7-16.000MHZ-D2Y-T, Mouser Price/Stock=https://www.mouser.co.uk/ProductDetail/ABRACON/ABM7-16.000MHZ-D2Y-T?qs=LoTOQoUkC8QdlhlqgnS4cw%3D%3D

## Via types
v1: diameter 50, hole 28, Top Layer to Bottom Layer, 55 vias

## Nets (pads, with @x,y where several pads share a name; then routed paths per layer and width w, separated by ;. In a path a pad name is that pad's centre, name@x,y a point inside that pad or via, vN(x,y) a via of type N, cw(c..) or ccw(c..) an arc to the next point about the centre after c; other vN are vias at no path point)
16U2_16MHZ_XTAL1: C10.2 IC2.1 R9.1 Y2.1 | length 766.2
  Top Layer w10: IC2.1@1939.76,1958.15 1939.76,1940.93 1900.17,1901.33 1893.42,1901.33 1860.63,1868.54 R9.1@1860.63,1825 1860.63,1739.37 2009.65,1590.35 2090,1590.35 Y2.1@2095,1585.35 ; Y2.1@2100,1590.35 2113.78,1590.35 2229.13,1475 C10.2@2264.72,1475
16U2_16MHZ_XTAL2: C9.2 IC2.2 R9.2 Y2.2 | length 590.1
  Top Layer w10: IC2.2@1971.26,1958.15 1969.97,1956.86 1969.97,1919.97 1939.37,1889.37 1939.37,1785.63 1965.35,1759.65 2090,1759.65 Y2.2@2095,1754.65 ; Y2.2@2100,1759.65 2113.78,1759.65 2252.01,1621.42 2252.01,1612.72 C9.2@2264.72,1600
16U2_BUF_RESETn: C31.2 R23.2 U5.1 U5.2 | length 249.8
  Top Layer w10: R23.2@1619.37,2360 1624.37,2365 U5.2@1700.79,2365 ; C31.2@1625.28,2500 1625.28,2499.72 1630,2495 1630,2487.4 1694.05,2423.35 1694.05,2409.14 U5.1@1700.79,2402.4
  Top Layer w20: U5.2@1700.79,2365 U5.1@1700.79,2402.4
16U2_HDR_RESETn: J6.05 P3.3 | length 1576.5
  Top Layer w10: P3.3@1135,2760 1290,2605 2420,2605 2460,2565 2460,2465 J6.05@2510,2415
16U2_PB4: IC2.18 P2.1 P3.2 | length 1347.6
  Top Layer w10: P2.1@2125,2420 2128.74,2416.26 IC2.18@2128.74,2291.85
  Bottom Layer w10: P3.2@1135,2860 1135,2845.66 1150.38,2830.28 1150.38,2829.62 1604.48,2375.52 2080.52,2375.52 P2.1@2125,2420
16U2_PB5: IC2.19 P2.3 | length 258.1
  Top Layer w10: IC2.19@2097.24,2291.85 2097.24,2362.76 2075,2385 2075,2470 P2.3@2125,2520
16U2_PB6: IC2.20 P2.2 | length 145
  Top Layer w10: P2.2@2025,2420 2029.96,2415.04 2029.96,2372.52 2065.75,2336.73 IC2.20@2065.75,2291.85
16U2_PB7: IC2.21 P2.4 | length 277.5
  Top Layer w10: P2.4@2025,2520 1970,2465 1970,2390 2030.17,2329.83 2030.17,2295.93 IC2.21@2034.25,2291.85
16U2_RESETn: IC2.24 P3.4 R4.2 U5.4 | length 1423.4
  Top Layer w10: P3.4@1135,2660 1230,2565 1845,2565 1939.76,2470.24 IC2.24@1939.76,2309.07 ; U5.4@1799.21,2327.6 1811.02,2327.6 1846.77,2291.85 IC2.24@1939.76,2291.85 IC2.24@1939.76,2309.07 ; R4.2@1854.37,2480 1854.37,2394.47 IC2.24@1939.76,2309.07
16U2_SCLK: J6.03 R5.1 | length 260.7
  Top Layer w10: J6.03@2410,2415 2475,2350 2595.63,2350 2602.09,2356.46 2611.93,2356.46 2625.63,2370.16 R5.1@2625.63,2380
16U2PROG_328P_RESETn: IC2.13 P1.2 R1.2 | length 1439.3
  Top Layer w10: IC2.13@2216.85,2140.75 2331.22,2140.75 2415.63,2225.16 R1.2@2415.63,2235 ; R1.2@2422.18,2215 2422.18,2224.84 2435.89,2238.54 2445.73,2238.54 2492.18,2285 v1(2675,2285)
  Bottom Layer w10: v1(2675,2285) 2925,2285 3355,2715 P1.2@3355,2765
328P_16MHZ_XTAL1: C27.2 IC1.9 R16.2 Y1.1 | length 1552.8
  Top Layer w10: C27.2@2625,1160.28 2625,1310.87 2665.35,1351.22 Y1.1@2665.35,1365 2690.63,1390.28 R16.2@2690.63,1520 2704.33,1533.7 2704.33,1589.33 2795,1680 v1(2795,1750)
  Bottom Layer w10: v1(2795,1750) 2795,1748.14 2828.14,1715 3405,1715 3425,1735 3425,1785 3465,1825 3521.26,1825 IC1.9@3575,1771.26
328P_16MHZ_XTAL2: C25.2 IC1.10 R16.1 Y1.2 | length 1286
  Top Layer w10: C25.2@2775,1160.28 2775,1291.57 2834.65,1351.22 Y1.2@2834.65,1365 2834.65,1378.78 2769.37,1444.06 R16.1@2769.37,1520 2769.37,1529.84 2769.37,1584.37 2840,1655 2880,1655 v1(2885,1660)
  Bottom Layer w10: v1(2885,1660) 3410,1660 3475,1725 IC1.10@3475,1771.26
328P_AUTORESETn: C11.2 R18.1 U6.1 | length 1531.6
  Top Layer w10: C11.2@3465.28,2650 3465.28,2642.13 3525,2582.4 3525,2435 3610,2350 v1(3720,2350) ; U6.1@4377.4,2289.21 4377.4,2277.4 4384.21,2270.59 4410.2,2270.59 4465.16,2215.63 R18.1@4475,2215.63 4475,2170.82 4460,2155.82 v1(4460,2145)
  Bottom Layer w10: v1(3720,2350) 4010,2350 4245,2115 4430,2115 v1(4460,2145)
328P_BUF_RESETn: C32.2 R24.2 U6.2 | length 564.7
  Top Layer w10: C32.2@4480,2070.28 4444.72,2070.28 4410,2105 4410,2220.55 4397.39,2233.16 4365.68,2233.16 4345,2253.84 4345,2284.21 U6.2@4340,2289.21 4340,2333.43 4372.5,2365.93 4372.5,2367.5 4405,2400 4439.37,2400 4465.83,2426.46 4475.67,2426.46 4489.37,2440.16 R24.2@4489.37,2450
328P_RESETn: IC1.1 J1.3 J5.05 P3.1 R14.1 U6.4 | length 6227.5
  Top Layer w10: v1(2885,1190) 2885,1135 2965,1055 3170,1055 J1.3@3235,1120 3310,1045 3750,1045 3825,1120 3825,1495 3880,1550 4275,1550 4375,1650 IC1.1@4375,1771.26 ; U6.4@4302.6,2190.79 4302.6,2122.4 4373,2052 4373,1773.26 IC1.1@4375,1771.26 ; R14.1@4475,1735.63 4410.63,1735.63 IC1.1@4375,1771.26
  Bottom Layer w10: P3.1@1135,2960 1170,2995 2490,2995 2595,2890 2595,2700 ; J5.05@2510,2730 2565,2730 2595,2700 ; v1(2885,1190) 2595,1480 2595,2700
+3V3: C13.2 C16.2 IC5.4 IC5.5 J1.4 P4.3 R28.1 | length 1408.1
  Top Layer w10: C16.2@3290.28,1270 3290.28,1164.72 J1.4@3335,1120
  Bottom Layer w20: P4.3@2170,1120 2260,1030 3245,1030 J1.4@3335,1120
+3V3_16U2_UCAP: C7.2 IC2.27 R26.1 | length 324.3
  Top Layer w10: R26.1@1634.37,2175 1648.07,2188.7 1648.07,2201.22 1689.41,2242.56 1702.13,2255.28 1774.72,2255.28 1842.11,2187.89 1842.11,2186.96 1849.14,2179.93 1850.07,2179.93 1850.94,2179.06 1876.34,2179.06 IC2.27@1883.15,2172.24
+5: C2.1 C6.2 C12.2 C14.2 IC2.31 IC5.1 IC5.2 J1.5 L1.2 P4.1 R27.2 | length 2980.3
  Top Layer w10: L1.2@1275,1435.63 L1.2@1284.84,1435.63 ; C2.1@1475,1322.83 C2.1@1475,1360.24 1481.24,1354 1601,1354 ; J1.5@3435,1120 3510.28,1195.28 C14.2@3510.28,1250
  Top Layer w20: 1601,1354 1601,1972 1654,2025 1731.24,2025 1770.28,1985.96 C6.2@1770.28,1950 ; 1772.21,1980.75 1837.73,2046.26 IC2.31@1883.15,2046.26
  Bottom Layer w20: P4.1@2170,1320 2250,1320 2370,1200 2710,1200 2785,1125 2890,1125 3120,1355 3380,1355 3435,1300 J1.5@3435,1120